# Altium PCB XCKU5P.PcbDoc (part 3 of 4)
Units mil, origin at the board's own origin, x right, y up, seen from the top; angles counter-clockwise.
Board outline 2716.54 x 2559.06 mil, 5 copper layers (Top Layer, SIG1, SIG2, SIG3, Bottom Layer); 206 components, 306 nets, 1544 pads, 186 vias.
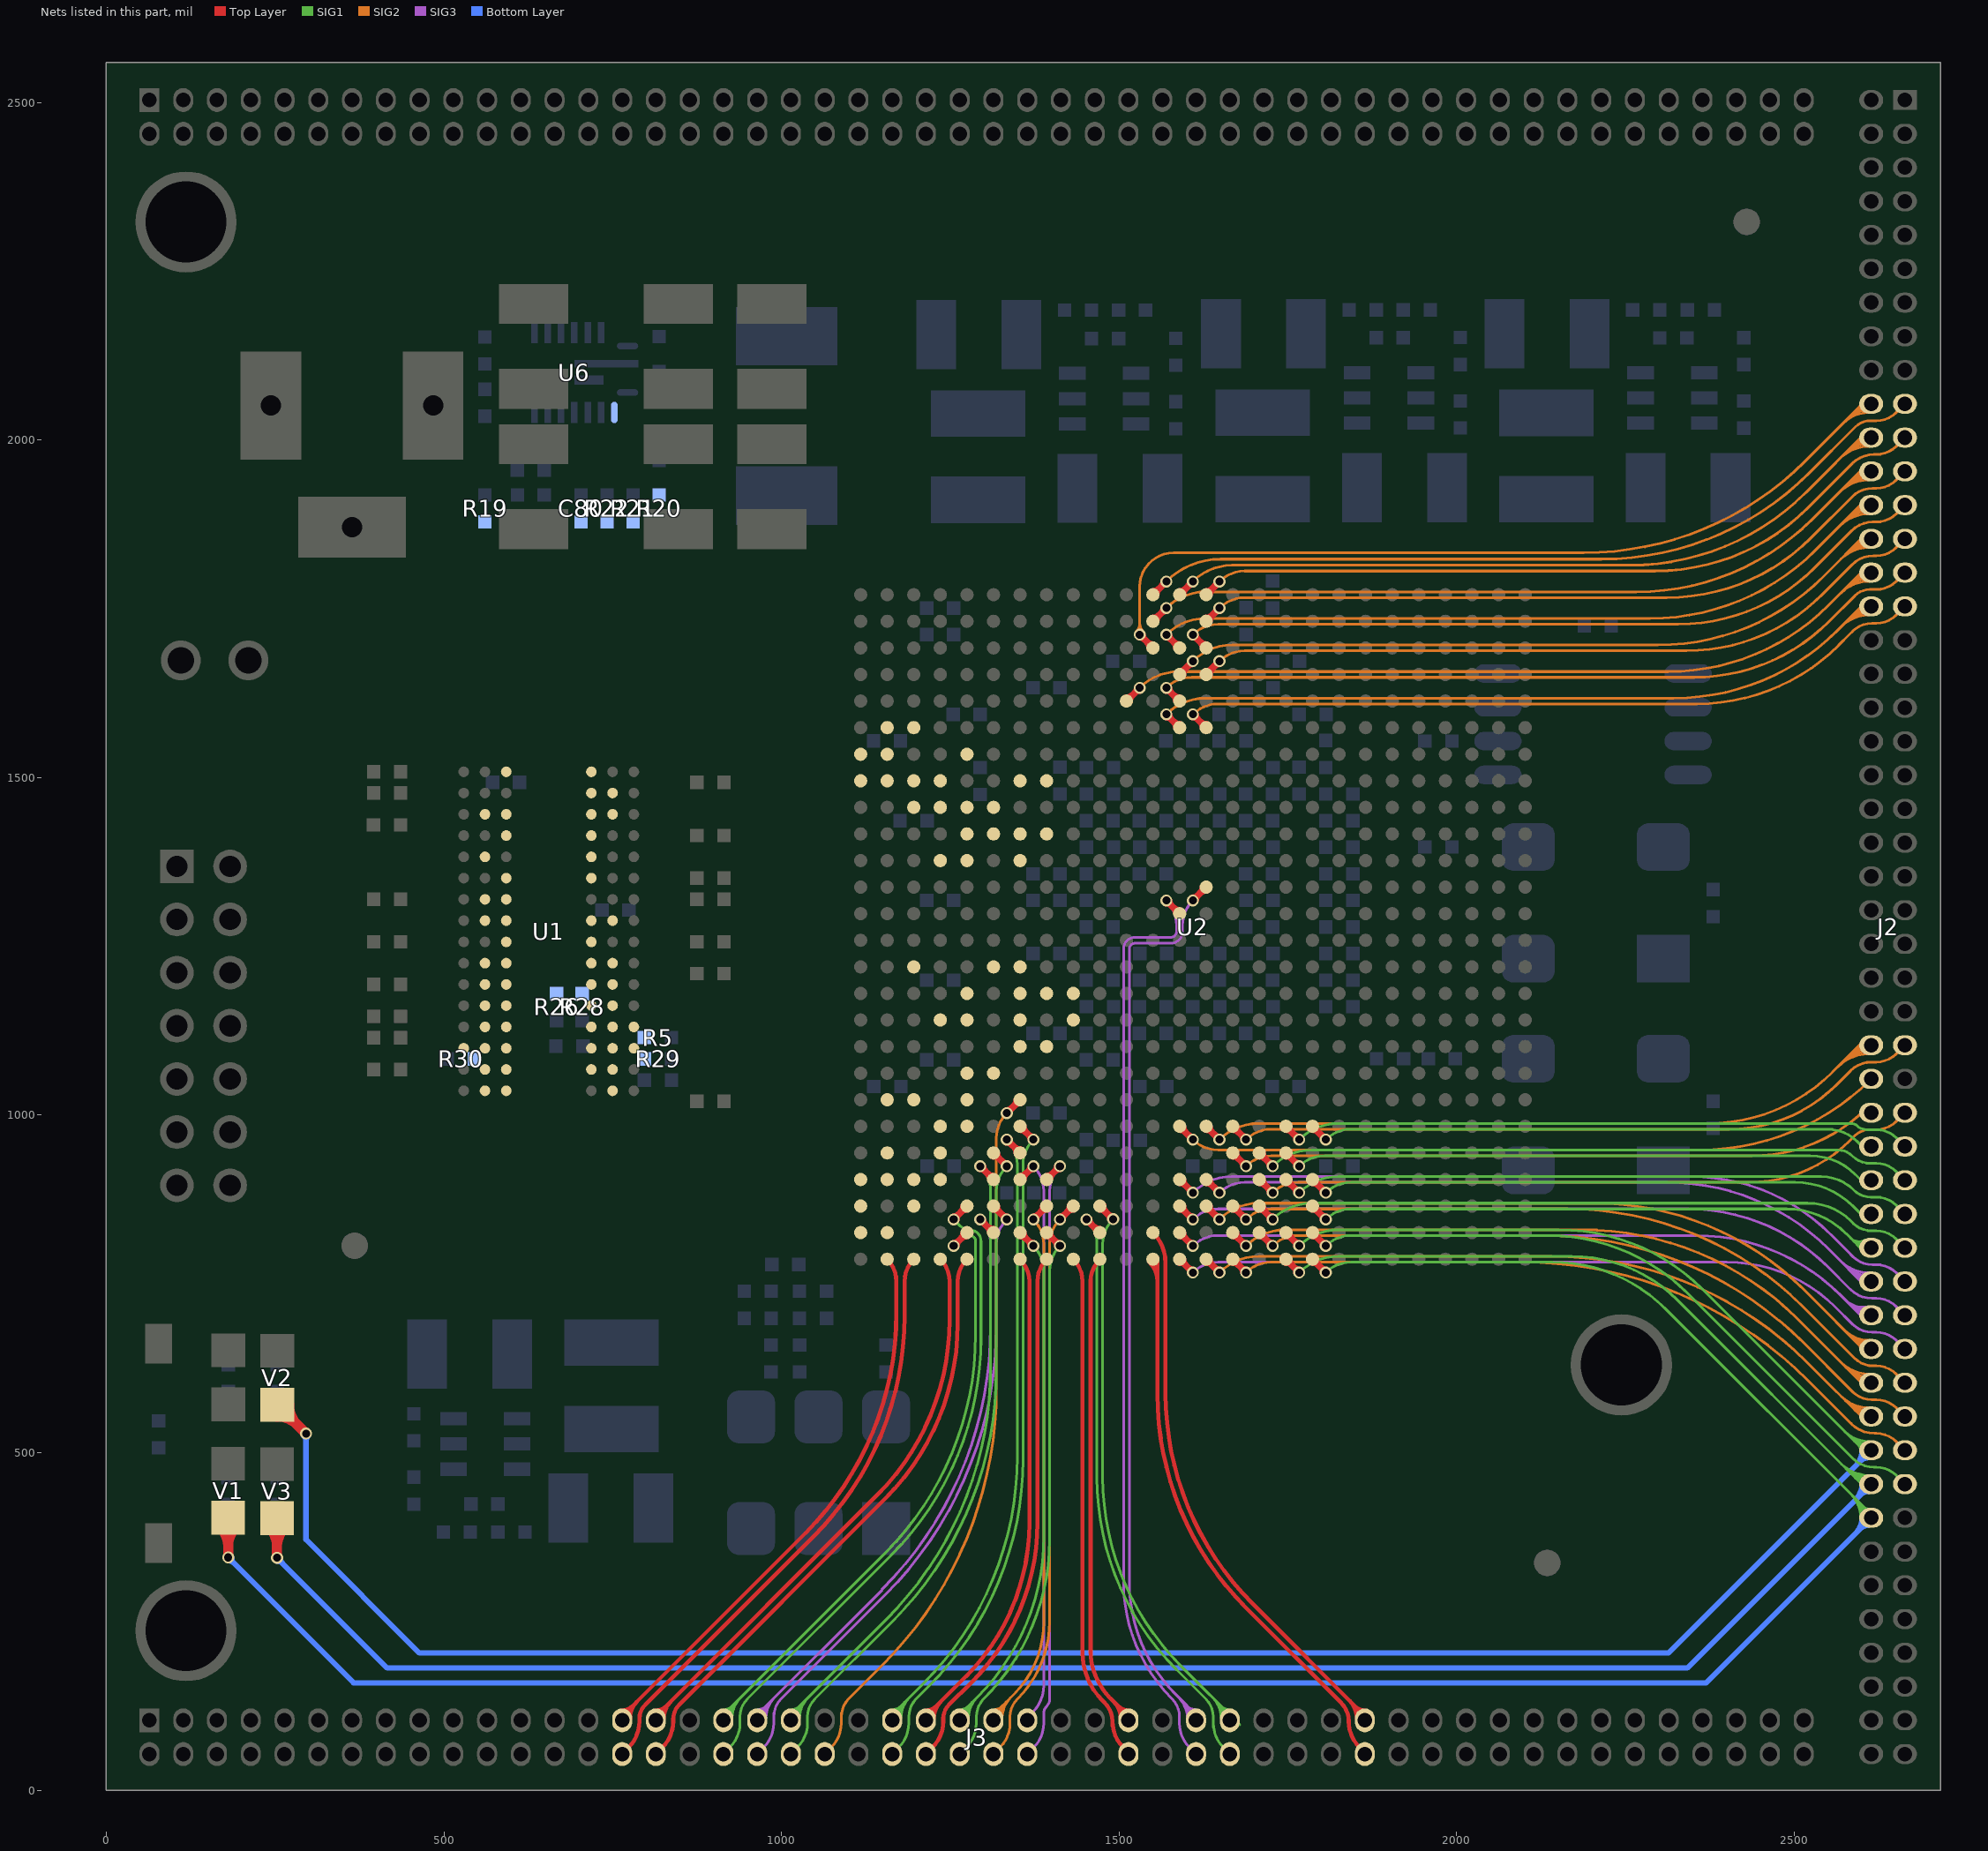
[diagram p6: the nets of this part, all layers, seen from the top]

## Via types
v1: diameter 17.72, hole 11.81, Top Layer to Bottom Layer, tented both sides, 186 vias

## Nets (pads, with @x,y where several pads share a name; then routed paths per layer and width w, separated by ;. In a path a pad name is that pad's centre, name@x,y a point inside that pad or via, vN(x,y) a via of type N, cw(c..) or ccw(c..) an arc to the next point about the centre after c; other vN are vias at no path point) (continued)
67_L9_P: J3.42 U2.G20 | length 1091
  Top Layer w10: v1(1333.76,1003.04) U2.G20@1353.45,1022.73 ; v1@1333.76,1006.9 ccw(c1333.76,1016.21) 1340.35,1009.63 ccw(c1346.94,1003.04) v1@1337.62,1003.04 ; U2.G20@1348.61,1022.73 cw(c1336.92,1022.73) 1345.18,1014.46 cw(c1353.45,1006.19) U2.G20@1353.45,1017.89
  SIG2 w4: J3.42@1064.02,53.5 1073.27,62.75 ccw(c1036.27,99.76) 1088.6,99.76 1088.6,108.71 cw(c1126.2,108.71) 1099.61,135.3 1148.59,184.27 ccw(c738.79,594.07) 1318.33,594.07 1318.33,965.78 cw(c1371.03,965.78) v1(1333.76,1003.04)
67_L10_N: J3.45 U2.E20 | length 1067.2
  Top Layer w10: v1@1333.76,959.82 cw(c1333.76,950.5) 1340.35,957.09 cw(c1346.94,963.67) v1@1337.62,963.67 ; v1(1333.76,963.67) U2.E20@1353.45,943.99 ; U2.E20@1348.61,943.99 ccw(c1336.92,943.99) 1345.18,952.25 ccw(c1353.45,960.52) U2.E20@1353.45,948.83
  SIG1 w4: J3.45@1164.02,111.72 1209.64,157.35 ccw(c872.73,494.26) 1349.2,494.26 1349.2,926.41 ccw(c1296.5,926.41) v1(1333.76,963.67) ; J3.45@1164.02,119.22 ccw(c1164.02,137.3) 1176.81,124.51 ; J3.45@1168.78,106.45 cw(c1193.01,106.45) 1175.88,123.58 ; J3.45@1172.78,106.45 cw(c1206.67,106.45) 1182.71,130.41 ; J3.45@1176.78,106.45 cw(c1220.32,106.45) 1189.54,137.24
67_L10_P: J3.46 U2.F20 | length 1031
  Top Layer w10: U2.F20@1353.45,978.52 cw(c1353.45,966.82) 1361.72,975.09 cw(c1369.98,983.36) U2.F20@1358.29,983.36 ; U2.F20@1353.45,983.36 v1(1373.13,963.67) ; v1@1369.28,963.67 ccw(c1359.96,963.67) 1366.55,970.26 ccw(c1373.13,976.84) v1@1373.13,967.53
  SIG1 w4: J3.46@1164.02,53.5 1173.27,62.75 ccw(c1136.27,99.76) 1188.6,99.76 1188.6,108.71 cw(c1226.2,108.71) 1199.61,135.3 1218.54,154.23 ccw(c882.6,490.17) 1357.7,490.17 1357.7,926.41 cw(c1410.4,926.41) v1(1373.13,963.67)
67_L12_N: J3.53 U2.D20 | length 884.7
  Top Layer w10: U2.D20@1353.45,904.62 v1(1373.13,924.3) ; U2.D20@1353.45,909.46 ccw(c1353.45,921.15) 1361.72,912.88 ccw(c1369.98,904.62) U2.D20@1358.29,904.62 ; v1@1369.28,924.3 cw(c1359.96,924.3) 1366.55,917.72 cw(c1373.13,911.13) v1@1373.13,920.45
  SIG3 w4: J3.53@1367.6,110.8 1371.93,115.13 ccw(c1331.77,155.3) 1388.57,155.3 1388.57,887.04 ccw(c1335.87,887.04) v1(1373.13,924.3)
67_L12_P: J3.54 U2.D19 | length 946
  Top Layer w10: U2.D19@1392.82,904.62 v1(1412.5,924.3) ; U2.D19@1392.82,909.46 ccw(c1392.82,921.15) 1401.09,912.88 ccw(c1409.35,904.62) U2.D19@1397.66,904.62 ; v1@1408.65,924.3 cw(c1399.33,924.3) 1405.92,917.72 cw(c1412.5,911.13) v1@1412.5,920.45
  SIG3 w4: J3.54@1364.02,53.5 1373.27,62.75 ccw(c1336.27,99.76) 1388.6,99.76 1388.6,114.08 cw(c1403.07,114.08) 1392.83,124.32 ccw(c1382.58,134.57) 1397.07,134.57 1397.07,141.5 1397.07,887.04 cw(c1449.77,887.04) v1(1412.5,924.3)
67_L13_N: J3.51 U2.C19 | length 918.6
  Top Layer w10: v1(1373.13,845.56) U2.C19@1392.82,865.25 ; v1@1373.13,849.42 ccw(c1373.13,858.73) 1379.72,852.15 ccw(c1386.31,845.56) v1@1376.99,845.56 ; U2.C19@1387.98,865.25 cw(c1376.29,865.25) 1384.55,856.98 cw(c1392.82,848.71) U2.C19@1392.82,860.41
  SIG2 w4: J3.51@1313.05,110.75 1344.24,141.94 ccw(c1237.22,248.96) 1388.57,248.96 1388.57,808.3 ccw(c1335.87,808.3) v1(1373.13,845.56) ; J3.51@1314.02,119.22 ccw(c1314.02,137.3) 1326.81,124.51 ; J3.51@1318.78,106.45 cw(c1343.01,106.45) 1325.88,123.58 ; J3.51@1322.78,106.45 cw(c1356.67,106.45) 1332.71,130.41 ; J3.51@1326.78,106.45 cw(c1370.32,106.45) 1339.54,137.24
67_L13_P: J3.52 U2.C18 | length 880.6
  Top Layer w10: v1(1412.5,845.56) U2.C18@1432.19,865.25 ; v1@1412.5,849.42 ccw(c1412.5,858.73) 1419.09,852.15 ccw(c1425.68,845.56) v1@1416.36,845.56 ; U2.C18@1427.35,865.25 cw(c1415.66,865.25) 1423.92,856.98 cw(c1432.19,848.71) U2.C18@1432.19,860.41
  SIG2 w4: J3.52@1314.02,53.5 1323.27,62.75 ccw(c1286.27,99.76) 1338.6,99.76 1338.6,108.71 cw(c1376.2,108.71) 1349.61,135.3 ccw(c1235.05,249.86) 1397.07,249.86 1397.07,808.3 cw(c1449.77,808.3) v1(1412.5,845.56)
67_L14_N: J3.49 U2.B20 | length 892.6
  Top Layer w10: U2.B20@1353.45,821.04 cw(c1353.45,809.34) 1361.72,817.61 cw(c1369.98,825.88) U2.B20@1358.29,825.88 ; U2.B20@1353.45,825.88 v1(1373.13,806.19) ; v1@1369.28,806.19 ccw(c1359.96,806.19) 1366.55,812.78 ccw(c1373.13,819.36) v1@1373.13,810.05
  SIG1 w4: J3.49@1262.55,110.25 1289.69,137.39 ccw(c1050.96,376.12) 1388.57,376.12 1388.57,768.93 ccw(c1335.87,768.93) v1(1373.13,806.19) ; J3.49@1264.02,119.22 ccw(c1264.02,137.3) 1276.81,124.51 ; J3.49@1268.78,106.45 cw(c1293.01,106.45) 1275.88,123.58 ; J3.49@1272.78,106.45 cw(c1306.67,106.45) 1282.71,130.41 ; J3.49@1276.78,106.45 cw(c1320.32,106.45) 1289.54,137.24
67_L14_P: J3.50 U2.B19 | length 854.6
  Top Layer w10: U2.B19@1392.82,821.04 cw(c1392.82,809.34) 1401.09,817.61 cw(c1409.35,825.88) U2.B19@1397.66,825.88 ; U2.B19@1392.82,825.88 v1(1412.5,806.19) ; v1@1408.65,806.19 ccw(c1399.33,806.19) 1405.92,812.78 ccw(c1412.5,819.36) v1@1412.5,810.05
  SIG1 w4: J3.50@1264.02,53.5 1273.27,62.75 ccw(c1236.27,99.76) 1288.6,99.76 1288.6,108.71 cw(c1326.2,108.71) 1299.61,135.3 ccw(c1064.33,370.58) 1397.07,370.58 1397.07,768.93 cw(c1449.77,768.93) v1(1412.5,806.19)
67_L15_N: J3.66 U2.B17 | length 917.2
  Top Layer w10: v1@1451.87,841.71 cw(c1451.87,832.39) 1458.46,838.98 cw(c1465.05,845.56) v1@1455.73,845.56 ; v1(1451.87,845.56) U2.B17@1471.56,825.88 ; U2.B17@1466.72,825.88 ccw(c1455.03,825.88) 1463.29,834.14 ccw(c1471.56,842.41) U2.B17@1471.56,830.72
  SIG1 w4: v1@1451.84,845.82 cw(c1414.57,808.55) 1467.27,808.55 1467.27,463.41 ccw(c1870.35,463.41) 1585.06,178.67 ; 1585.33,178.39 1628.43,135.3 cw(c1601.84,108.71) 1639.44,108.71 1639.44,99.76 ccw(c1691.77,99.76) 1654.77,62.75 J3.66@1664.02,53.5
67_L15_P: J3.65 U2.C17 | length 974.8
  Top Layer w10: U2.C17@1471.56,860.41 cw(c1471.56,848.71) 1479.83,856.98 cw(c1488.09,865.25) U2.C17@1476.4,865.25 ; U2.C17@1471.56,865.25 v1@1491.24,845.56 ; 1484.24,852.56 ccw(c1491.21,859.53) v1@1491.21,849.68 ; 1484.78,852.03 cw(c1478.57,845.82) v1@1487.35,845.82
  SIG1 w4: v1(1491.21,845.82) ccw(c1528.47,808.55) 1475.77,808.55 1475.77,463.95 ccw(c1871.65,463.95) 1591.72,184.02 1678.72,97.02 ; 1638.5,137.24 cw(c1607.72,106.45) J3.65@1651.26,106.45 ; 1645.33,130.41 cw(c1621.37,106.45) J3.65@1655.26,106.45 ; 1651.23,124.51 ccw(c1664.02,137.3) J3.65@1664.02,119.22 ; 1652.16,123.58 cw(c1635.03,106.45) J3.65@1659.26,106.45
67_L16_N: J3.60 U2.A18 | length 757.3
  Top Layer w6: U2.A18@1432.19,786.51 cw(c1399.15,753.47) 1445.87,753.47 1445.87,203.67 ccw(c1545.87,203.67) 1475.16,132.96 1479.13,129 cw(c1452.54,102.41) 1490.14,102.41 ccw(c1546.22,102.41) 1506.57,62.75 J3.60@1515.82,53.5
67_L16_P: J3.59 U2.A17 | length 760.7
  Top Layer w6: U2.A17@1471.56,786.51 ccw(c1504.6,753.47) 1457.87,753.47 1457.87,206.84 ccw(c1557.87,206.84) 1487.16,136.13 J3.59@1514.02,109.28 ; 1491.94,131.36 cw(c1467.04,106.45) J3.59@1502.26,106.45 ; 1498.76,124.54 ccw(c1514.02,139.8) J3.59@1514.02,118.22 ; 1502.18,121.11 cw(c1487.52,106.45) J3.59@1508.26,106.45
67_L17_N: J3.74 U2.A15 | length 889.1
  Top Layer w6: U2.A15@1545.46,781.67 cw(c1517.82,754.03) 1556.91,754.03 ; U2.A15@1549.7,785.91 cw(c1532.3,768.51) 1556.91,768.51 ; U2.A15@1556.91,787.9 1556.91,586.8 ccw(c2004.95,586.8) 1688.14,269.99 1829.13,129 cw(c1802.54,102.41) 1840.14,102.41 ccw(c1896.22,102.41) 1856.57,62.75 J3.74@1865.82,53.5
67_L17_P: J3.73 U2.B15 | length 881.3
  Top Layer w6: U2.B15@1550.3,825.88 cw(c1505.37,780.95) 1568.91,780.95 1568.91,587.43 ccw(c2009.14,587.43) 1697.85,276.15 J3.73@1860.43,113.56 ; 1841.45,132.55 cw(c1815.35,106.45) J3.73@1852.26,106.45 ; 1849.95,124.04 ccw(c1864.02,138.11) J3.73@1864.02,118.22 ; 1851.69,122.31 cw(c1835.83,106.45) J3.73@1858.26,106.45
67_L18_N: J3.47 U2.A20 | length 791.4
  Top Layer w6: J3.47@1214.02,109.28 1273,168.26 ccw(c1045.75,395.51) 1367.13,395.51 1367.13,753.47 ccw(c1320.41,753.47) U2.A20@1353.45,786.51 ; J3.47@1214.02,118.22 ccw(c1214.02,139.8) 1229.28,124.54 ; J3.47@1219.78,106.45 cw(c1240.52,106.45) 1225.86,121.11 ; J3.47@1225.78,106.45 cw(c1261,106.45) 1236.1,131.36
67_L18_P: J3.48 U2.A19 | length 787
  Top Layer w6: J3.48@1214.02,53.5 1223.27,62.75 ccw(c1183.61,102.41) 1239.7,102.41 1239.7,106.24 cw(c1268.07,106.24) 1248.01,126.29 1281.04,159.33 ccw(c1044.22,396.15) 1379.13,396.15 1379.13,753.47 cw(c1425.86,753.47) U2.A19@1392.82,786.51
67_L19_N: J3.31 U2.A23 | length 906.2
  Top Layer w6: J3.31@814.02,109.28 1141.47,436.73 ccw(c881.83,696.38) 1249.02,696.38 1249.02,753.47 ccw(c1202.3,753.47) U2.A23@1235.34,786.51 ; J3.31@814.02,118.22 ccw(c814.02,139.8) 829.28,124.54 ; J3.31@819.78,106.45 cw(c840.52,106.45) 825.86,121.11 ; J3.31@825.78,106.45 cw(c861,106.45) 836.1,131.36
67_L19_P: J3.32 U2.A22 | length 902.3
  Top Layer w6: J3.32@814.02,53.5 823.27,62.75 ccw(c783.61,102.41) 839.7,102.41 839.7,104.85 cw(c871.41,104.85) 848.99,127.27 1154.05,432.33 ccw(c895.78,690.6) 1261.02,690.6 1261.02,753.47 cw(c1307.75,753.47) U2.A22@1274.71,786.51
67_L20_N: J3.39 U2.D21 | length 1077.2
  Top Layer w10: v1@1294.39,920.45 cw(c1294.39,911.13) 1300.98,917.72 cw(c1307.57,924.3) v1@1298.25,924.3 ; v1(1294.39,924.3) U2.D21@1314.08,904.62 ; U2.D21@1309.24,904.62 ccw(c1297.55,904.62) 1305.81,912.88 ccw(c1314.08,921.15) U2.D21@1314.08,909.46
  SIG1 w4: J3.39@1009.91,107.61 1155.07,252.78 ccw(c781.47,626.39) 1309.83,626.39 1309.83,887.04 ccw(c1257.13,887.04) v1(1294.39,924.3) ; J3.39@1014.02,119.22 ccw(c1014.02,137.3) 1026.81,124.51 ; J3.39@1018.78,106.45 cw(c1043.01,106.45) 1025.88,123.58 ; J3.39@1022.78,106.45 cw(c1056.67,106.45) 1032.71,130.41 ; J3.39@1026.78,106.45 cw(c1070.32,106.45) 1039.54,137.24
67_L20_P: J3.40 U2.E21 | length 1035.4
  Top Layer w10: U2.E21@1314.08,939.15 cw(c1314.08,927.45) 1322.35,935.72 cw(c1330.61,943.99) U2.E21@1318.92,943.99 ; U2.E21@1314.08,943.99 v1(1333.76,924.3) ; v1@1329.91,924.3 ccw(c1320.59,924.3) 1327.18,930.89 ccw(c1333.76,937.47) v1@1333.76,928.16
  SIG1 w4: J3.40@1014.02,53.5 1023.27,62.75 ccw(c986.27,99.76) 1038.6,99.76 1038.6,108.71 cw(c1076.2,108.71) 1049.61,135.3 1164.66,250.35 ccw(c793.68,621.33) 1318.33,621.33 1318.33,887.04 cw(c1371.03,887.04) v1(1333.76,924.3)
67_L22_N: J3.37 U2.B21 | length 1017.3
  Top Layer w10: v1@1294.39,841.71 cw(c1294.39,832.39) 1300.98,838.98 cw(c1307.57,845.56) v1@1298.25,845.56 ; v1(1294.39,845.56) U2.B21@1314.08,825.88 ; U2.B21@1309.24,825.88 ccw(c1297.55,825.88) 1305.81,834.14 ccw(c1314.08,842.41) U2.B21@1314.08,830.72
  SIG3 w4: J3.37@960.01,107.51 1148.99,296.5 ; J3.37@964.02,119.22 ccw(c964.02,137.78) 977.15,124.65 ; J3.37@968.78,106.45 cw(c992.53,106.45) 975.74,123.25 ; J3.37@972.78,106.45 cw(c1006.19,106.45) 982.57,130.08 ; J3.37@976.78,106.45 cw(c1019.85,106.45) 989.4,136.9 ; 1148.58,296.91 ccw(c759.29,686.21) 1309.83,686.21 1309.83,808.3 ccw(c1257.13,808.3) v1(1294.39,845.56)
67_L22_P: J3.38 U2.C21 | length 975.7
  Top Layer w10: U2.C21@1314.08,860.41 cw(c1314.08,848.71) 1322.35,856.98 cw(c1330.61,865.25) U2.C21@1318.92,865.25 ; U2.C21@1314.08,865.25 v1(1333.76,845.56) ; v1@1329.91,845.56 ccw(c1320.59,845.56) 1327.18,852.15 ccw(c1333.76,858.73) v1@1333.76,849.42
  SIG3 w4: J3.38@964.02,53.5 973.27,62.75 ccw(c936.27,99.76) 988.6,99.76 988.6,108.71 cw(c1026.2,108.71) 999.61,135.3 1153.83,289.51 ccw(c756.69,686.65) 1318.33,686.65 1318.33,808.3 cw(c1371.03,808.3) v1(1333.76,845.56)
67_L23_N: J3.29 U2.A25 | length 890.2
  Top Layer w6: J3.29@764.02,109.28 1035.19,380.45 ccw(c709.04,706.59) 1170.28,706.59 1170.28,753.47 ccw(c1123.56,753.47) U2.A25@1156.6,786.51 ; J3.29@764.02,118.22 ccw(c764.02,139.8) 779.28,124.54 ; J3.29@769.78,106.45 cw(c790.52,106.45) 775.86,121.11 ; J3.29@775.78,106.45 cw(c811,106.45) 786.1,131.36
67_L23_P: J3.30 U2.A24 | length 886.4
  Top Layer w6: J3.30@764.02,53.5 773.27,62.75 ccw(c733.61,102.41) 789.7,102.41 789.7,106.24 cw(c818.06,106.24) 798.01,126.29 1046.99,375.28 ccw(c720.37,701.9) 1182.28,701.9 1182.28,753.47 cw(c1229.01,753.47) U2.A24@1195.97,786.51
67_L24_N: J3.35 U2.B22 | length 1039.9
  Top Layer w10: v1(1255.02,806.19) U2.B22@1274.71,825.88 ; v1@1255.02,810.05 ccw(c1255.02,819.36) 1261.61,812.78 ccw(c1268.2,806.19) v1@1258.88,806.19 ; U2.B22@1269.87,825.88 cw(c1258.18,825.88) 1266.44,817.61 cw(c1274.71,809.34) U2.B22@1274.71,821.04
  SIG1 w4: J3.35@909.91,107.61 1153.7,351.4 ccw(c830.71,674.39) 1287.48,674.39 1287.48,813.51 ccw(c1279.61,813.51) 1279.61,821.38 1278.35,821.38 ccw(c1278.35,801.7) 1264.44,815.61 v1(1255.02,806.19) ; J3.35@914.02,119.22 ccw(c914.02,137.3) 926.81,124.51 ; J3.35@918.78,106.45 cw(c943.01,106.45) 925.88,123.58 ; J3.35@922.78,106.45 cw(c956.67,106.45) 932.71,130.41 ; J3.35@926.78,106.45 cw(c970.32,106.45) 939.54,137.24
67_L24_P: J3.36 U2.C22 | length 1010.5
  Top Layer w10: v1(1255.02,845.56) U2.C22@1274.71,865.25 ; v1@1255.02,849.42 ccw(c1255.02,858.73) 1261.61,852.15 ccw(c1268.2,845.56) v1@1258.88,845.56 ; U2.C22@1269.87,865.25 cw(c1258.18,865.25) 1266.44,856.98 cw(c1274.71,848.71) U2.C22@1274.71,860.41
  SIG1 w4: J3.36@914.02,53.5 923.27,62.75 ccw(c886.27,99.76) 938.6,99.76 938.6,108.71 cw(c976.2,108.71) 949.61,135.3 1162.12,347.81 ; 1162.36,348.05 ccw(c840.16,669.77) 1295.48,669.77 1295.48,813.89 ccw(c1280,813.89) 1280,829.38 cw(c1280,850.59) 1265,835.59 v1(1255.02,845.56)
A9: J2.86 U2.A9 V1.2 | length 3933.6
  Top Layer w10: U2.A9@1786.52,781.67 cw(c1786.52,769.97) 1794.79,778.24 cw(c1803.05,786.51) U2.A9@1791.36,786.51 ; U2.A9@1786.52,786.51 v1(1806.21,766.82) ; v1@1802.35,766.82 ccw(c1793.03,766.82) 1799.62,773.41 ccw(c1806.21,779.99) v1@1806.21,770.68
  Top Layer w15: V1.2@168.15,391.14 cw(c138.28,361.27) 180.53,361.27 cw(c222.77,361.27) V1.2@192.9,391.14 ; v1(180.53,344.77) V1.2@180.53,403.52
  SIG1 w4: v1(1806.21,766.82) cw(c1843.47,729.56) 1843.47,782.26 2141.87,782.26 cw(c2141.87,545) 2309.63,712.77 J2.86@2614.02,408.38 ; 2583.74,438.66 cw(c2548.58,403.5) J2.86@2598.3,403.5 ; 2590.57,431.83 cw(c2562.24,403.5) J2.86@2602.3,403.5 ; 2597.4,425 cw(c2575.89,403.5) J2.86@2606.3,403.5 ; 2602.65,419.75 ccw(c2611.07,428.17) J2.86@2611.07,416.26 ; 2604.22,418.18 cw(c2589.55,403.5) J2.86@2610.3,403.5
  Bottom Layer w8: v1@180.53,339.92 cw(c180.53,328.19) 188.82,336.48 cw(c197.11,344.77) v1@185.38,344.77 ; v1(180.53,344.77) 366.3,159 2369.52,159 J2.86@2614.02,403.5 ; 2590.6,380.08 ccw(c2567.19,403.5) J2.86@2600.3,403.5 ; 2597.73,387.21 cw(c2611.07,373.88) J2.86@2611.07,392.74
A10: J2.84 U2.A10 V3.2 | length 3907.8
  Top Layer w10: U2.A10@1747.15,781.67 cw(c1747.15,769.97) 1755.42,778.24 cw(c1763.68,786.51) U2.A10@1751.99,786.51 ; U2.A10@1747.15,786.51 v1(1766.84,766.82) ; v1@1762.98,766.82 ccw(c1753.66,766.82) 1760.25,773.41 ccw(c1766.84,779.99) v1@1766.84,770.68
  Top Layer w15: V3.2@240.56,390.64 cw(c210.69,360.77) 252.94,360.77 cw(c295.18,360.77) V3.2@265.31,390.64 ; v1(252.94,344.27) V3.2@252.94,403.02
  SIG1 w4: v1(1766.84,766.82) cw(c1824.62,709.04) 1824.62,790.76 2170.44,790.76 cw(c2170.44,569.11) 2327.16,725.84 J2.84@2608.55,444.45 ; 2569.53,483.47 ccw(c2611.07,525) J2.84@2611.07,466.26 ; 2576.36,476.64 ccw(c2611.07,511.35) J2.84@2611.07,462.26 ; 2583.19,469.81 ccw(c2611.07,497.69) J2.84@2611.07,458.26 ; 2590.02,462.98 ccw(c2611.07,484.03) J2.84@2611.07,454.26
  Bottom Layer w8: v1@252.94,339.42 cw(c252.94,327.69) 261.23,335.98 cw(c269.52,344.27) v1@257.79,344.27 ; v1(252.94,344.27) 416.21,181 2341.52,181 J2.84@2614.02,453.5 ; 2590.6,430.08 ccw(c2567.19,453.5) J2.84@2600.3,453.5 ; 2597.73,437.21 cw(c2611.07,423.88) J2.84@2611.07,442.74
A12: J2.81 U2.A12 | length 1126.7
  Top Layer w10: U2.A12@1668.41,781.67 cw(c1668.41,769.97) 1676.68,778.24 cw(c1684.94,786.51) U2.A12@1673.25,786.51 ; U2.A12@1668.41,786.51 v1(1688.1,766.82) ; v1@1684.24,766.82 ccw(c1674.92,766.82) 1681.51,773.41 ccw(c1688.1,779.99) v1@1688.1,770.68
  SIG2 w4: v1(1688.1,766.82) cw(c1725.36,729.56) 1725.36,782.26 2097.39,782.26 cw(c2097.39,184.38) 2520.16,607.14 2582.5,544.8 2584.58,542.72 ccw(c2618.92,577.07) 2618.92,528.5 2621.4,528.5 cw(c2621.4,485.96) 2651.48,516.04 J2.81@2664.02,503.5
A13: J2.80 U2.A13 | length 1245.9
  Top Layer w10: U2.A13@1629.04,781.67 cw(c1629.04,769.97) 1637.31,778.24 cw(c1645.57,786.51) U2.A13@1633.88,786.51 ; U2.A13@1629.04,786.51 v1(1648.73,766.82) ; v1@1644.87,766.82 ccw(c1635.55,766.82) 1642.14,773.41 ccw(c1648.73,779.99) v1@1648.73,770.68
  SIG2 w4: v1(1648.73,766.82) cw(c1706.51,709.04) 1706.51,790.76 2141.01,790.76 cw(c2141.01,256.88) 2518.51,634.39 J2.80@2608.55,544.35 ; 2569.36,583.54 ccw(c2611.07,625.24) J2.80@2611.07,566.26 ; 2576.19,576.71 ccw(c2611.07,611.59) J2.80@2611.07,562.26 ; 2583.02,569.88 ccw(c2611.07,597.93) J2.80@2611.07,558.26 ; 2589.85,563.05 ccw(c2611.07,584.27) J2.80@2611.07,554.26
A14: J2.75 U2.A14 | length 1159.6
  Top Layer w10: U2.A14@1589.67,781.67 cw(c1589.67,769.97) 1597.94,778.24 cw(c1606.2,786.51) U2.A14@1594.51,786.51 ; U2.A14@1589.67,786.51 v1(1609.36,766.82) ; v1@1605.5,766.82 ccw(c1596.18,766.82) 1602.77,773.41 ccw(c1609.36,779.99) v1@1609.36,770.68
  SIG3 w4: v1(1609.36,766.82) cw(c1646.62,729.56) 1646.62,782.26 2399.98,782.26 cw(c2399.98,554.69) 2560.9,715.6 2586,690.5 ccw(c2614.97,719.47) 2614.97,678.5 2621.4,678.5 cw(c2621.4,635.96) 2651.48,666.04 J2.75@2664.02,653.5
AA13: J2.31 U2.AA13 | length 1163.1
  Top Layer w10: v1@1609.35,1589.74 cw(c1609.35,1580.42) 1615.94,1587.01 cw(c1622.53,1593.6) v1@1613.21,1593.6 ; v1(1609.35,1593.6) U2.AA13@1629.04,1573.91 ; U2.AA13@1624.2,1573.91 ccw(c1612.51,1573.91) 1620.77,1582.18 ccw(c1629.04,1590.44) U2.AA13@1629.04,1578.75
  SIG2 w4: v1(1609.35,1593.6) cw(c1646.62,1556.33) 1646.62,1609.03 2355.84,1609.03 ccw(c2355.84,1906.2) 2565.97,1696.07 2581.9,1712 2586.59,1716.69 cw(c2615.1,1688.17) 2615.1,1728.5 2621.4,1728.5 ccw(c2621.4,1771.04) 2651.48,1740.96 J2.31@2664.02,1753.5
AA14: J2.32 U2.AA14 | length 1288.6
  Top Layer w10: v1@1569.98,1589.74 cw(c1569.98,1580.42) 1576.57,1587.01 cw(c1583.16,1593.6) v1@1573.84,1593.6 ; v1(1569.98,1593.6) U2.AA14@1589.67,1573.91 ; U2.AA14@1584.83,1573.91 ccw(c1573.14,1573.91) 1581.4,1582.18 ccw(c1589.67,1590.44) U2.AA14@1589.67,1578.75
  SIG2 w4: v1(1569.98,1593.6) cw(c1627.77,1535.81) 1627.77,1617.53 2321.87,1617.53 ccw(c2321.87,1959.76) 2563.87,1717.77 J2.32@2608,1761.9 ; 2569.7,1723.6 cw(c2611.07,1682.24) J2.32@2611.07,1740.74 ; 2576.53,1730.43 cw(c2611.07,1695.89) J2.32@2611.07,1744.74 ; 2583.36,1737.26 cw(c2611.07,1709.55) J2.32@2611.07,1748.74 ; 2590.19,1744.09 cw(c2611.07,1723.21) J2.32@2611.07,1752.74
AB14: J2.29 U2.AB14 | length 1207.9
  Top Layer w10: v1@1569.98,1629.11 cw(c1569.98,1619.79) 1576.57,1626.38 cw(c1583.16,1632.97) v1@1573.84,1632.97 ; v1(1569.98,1632.97) U2.AB14@1589.67,1613.28 ; U2.AB14@1584.83,1613.28 ccw(c1573.14,1613.28) 1581.4,1621.55 ccw(c1589.67,1629.81) U2.AB14@1589.67,1618.12
  SIG2 w4: v1(1569.98,1632.97) cw(c1607.25,1595.7) 1607.25,1648.4 2351.98,1648.4 ccw(c2351.98,1930.45) 2551.41,1731.01 2589.85,1769.45 cw(c2611.69,1747.61) 2611.69,1778.5 2621.4,1778.5 ccw(c2621.4,1821.04) 2651.48,1790.96 J2.29@2664.02,1803.5
AB16: J2.30 U2.AB16 | length 1351.4
  Top Layer w10: U2.AB16@1510.93,1613.28 v1(1530.61,1632.97) ; U2.AB16@1510.93,1618.12 ccw(c1510.93,1629.81) 1519.2,1621.55 ccw(c1527.46,1613.28) U2.AB16@1515.77,1613.28 ; 1524.03,1626.38 ccw(c1517.44,1632.97) v1@1526.75,1632.97 ; 1524.03,1626.38 cw(c1530.61,1619.8) v1@1530.61,1629.11
  SIG2 w4: v1(1530.61,1632.97) cw(c1588.4,1575.18) 1588.4,1656.9 2313.33,1656.9 ccw(c2313.33,1993.13) 2551.08,1755.38 J2.30@2607.45,1811.75 ; 2569.02,1773.32 cw(c2611.07,1731.27) J2.30@2611.07,1790.74 ; 2575.85,1780.15 cw(c2611.07,1744.93) J2.30@2611.07,1794.74 ; 2582.68,1786.98 cw(c2611.07,1758.59) J2.30@2611.07,1798.74 ; 2589.5,1793.8 cw(c2611.07,1772.24) J2.30@2611.07,1802.74 ; 2596.33,1800.63 cw(c2611.07,1785.9) J2.30@2611.07,1806.74
AC13: J2.27 U2.AC13 | length 1133
  Top Layer w10: U2.AC13@1629.04,1652.65 v1(1648.73,1672.34) ; U2.AC13@1629.04,1657.49 ccw(c1629.04,1669.18) 1637.31,1660.92 ccw(c1645.57,1652.65) U2.AC13@1633.88,1652.65 ; v1@1644.87,1672.34 cw(c1635.55,1672.34) 1642.14,1665.75 cw(c1648.73,1659.16) v1@1648.73,1668.48
  SIG2 w4: v1(1648.73,1672.34) cw(c1685.99,1635.07) 1685.99,1687.77 2340.34,1687.77 ccw(c2340.34,1972.25) 2541.49,1771.09 2586.16,1815.76 cw(c2616.92,1785.01) 2616.92,1828.5 2621.4,1828.5 ccw(c2621.4,1871.04) 2651.48,1840.96 J2.27@2664.02,1853.5
AC14: J2.28 U2.AC14 | length 1278.9
  Top Layer w10: U2.AC14@1589.67,1652.65 v1(1609.36,1672.34) ; U2.AC14@1589.67,1657.49 ccw(c1589.67,1669.18) 1597.94,1660.92 ccw(c1606.2,1652.65) U2.AC14@1594.51,1652.65 ; v1@1605.5,1672.34 cw(c1596.18,1672.34) 1602.77,1665.75 cw(c1609.36,1659.16) v1@1609.36,1668.48
  SIG2 w4: v1(1609.36,1672.34) cw(c1667.14,1614.55) 1667.14,1696.27 ; 1667.14,1696.27 2298.44,1696.27 ; 2298.44,1696.27 ccw(c2298.44,2042.53) 2543.29,1797.69 J2.28@2608.35,1862.75 ; 2568.85,1823.25 cw(c2611.07,1781.03) J2.28@2611.07,1840.74 ; 2575.68,1830.08 cw(c2611.07,1794.69) J2.28@2611.07,1844.74 ; 2582.51,1836.91 cw(c2611.07,1808.34) J2.28@2611.07,1848.74 ; 2589.33,1843.73 cw(c2611.07,1822) J2.28@2611.07,1852.74 ; 2596.16,1850.56 cw(c2611.07,1835.66) J2.28@2611.07,1856.74
AD13: J2.25 U2.AD13 | length 1176.7
  Top Layer w10: v1@1609.35,1707.85 cw(c1609.35,1698.53) 1615.94,1705.12 cw(c1622.53,1711.71) v1@1613.21,1711.71 ; v1(1609.35,1711.71) U2.AD13@1629.04,1692.02 ; U2.AD13@1624.2,1692.02 ccw(c1612.51,1692.02) 1620.77,1700.29 ccw(c1629.04,1708.55) U2.AD13@1629.04,1696.86
  SIG2 w4: v1(1609.35,1711.71) cw(c1646.62,1674.44) 1646.62,1727.14 2328.43,1727.14 ccw(c2328.43,2013) 2530.57,1810.87 2585.56,1865.86 cw(c2616.07,1835.35) 2616.07,1878.5 2621.4,1878.5 ccw(c2621.4,1921.04) 2651.48,1890.96 J2.25@2664.02,1903.5
AD14: J2.26 U2.AD14 | length 1328.3
  Top Layer w10: v1@1569.98,1707.85 cw(c1569.98,1698.53) 1576.57,1705.12 cw(c1583.16,1711.71) v1@1573.84,1711.71 ; v1(1569.98,1711.71) U2.AD14@1589.67,1692.02 ; U2.AD14@1584.83,1692.02 ccw(c1573.14,1692.02) 1581.4,1700.29 ccw(c1589.67,1708.55) U2.AD14@1589.67,1696.86
  SIG2 w4: v1(1569.98,1711.71) cw(c1627.77,1653.92) 1627.77,1735.64 2286.6,1735.64 ccw(c2286.6,2082.66) 2531.75,1837.05 ; 2531.98,1837.28 J2.26@2606.3,1911.6 ; 2567.31,1872.61 cw(c2611.07,1828.86) J2.26@2611.07,1890.74 ; 2574.14,1879.44 cw(c2611.07,1842.51) J2.26@2611.07,1894.74 ; 2580.97,1886.27 cw(c2611.07,1856.17) J2.26@2611.07,1898.74 ; 2587.8,1893.1 cw(c2611.07,1869.83) J2.26@2611.07,1902.74 ; 2594.63,1899.93 cw(c2611.07,1883.49) J2.26@2611.07,1906.74
AD15: J2.20 U2.AD15 | length 1467
  Top Layer w10: v1@1530.61,1707.85 cw(c1530.61,1698.53) 1537.2,1705.12 cw(c1543.79,1711.71) v1@1534.47,1711.71 ; v1(1530.61,1711.71) U2.AD15@1550.3,1692.02 ; U2.AD15@1545.46,1692.02 ccw(c1533.77,1692.02) 1542.03,1700.29 ccw(c1550.3,1708.55) U2.AD15@1550.3,1696.86
  SIG2 w4: v1@1525.76,1716.56 ccw(c1514.06,1728.26) 1530.61,1728.26 ccw(c1547.17,1728.26) v1@1535.46,1716.56 ; v1(1530.61,1711.71) 1530.61,1782.65 cw(c1580.86,1782.65) 1580.86,1832.9 2188.53,1832.9 ccw(c2188.53,2296.35) 2516.24,1968.64 J2.20@2605.65,2058.05 ; 2572.26,2024.66 cw(c2611.07,1985.86) J2.20@2611.07,2040.74 ; 2579.09,2031.49 cw(c2611.07,1999.52) J2.20@2611.07,2044.74 ; 2585.92,2038.32 cw(c2611.07,2013.17) J2.20@2611.07,2048.74 ; 2592.75,2045.15 cw(c2611.07,2026.83) J2.20@2611.07,2052.74 ; 2596.33,2048.73 ccw(c2591.55,2053.5) J2.20@2598.3,2053.5
ADC_VN: J3.63 U2.R13 | length 1468.9
  Top Layer w10: v1(1609.35,1318) U2.R13@1629.04,1337.69 ; v1@1609.35,1321.86 ccw(c1609.35,1331.18) 1615.94,1324.59 ccw(c1622.53,1318) v1@1613.21,1318 ; U2.R13@1624.2,1337.69 cw(c1612.51,1337.69) 1620.77,1329.42 cw(c1629.04,1321.16) U2.R13@1629.04,1332.85
  SIG3 w4: 1588.64,136.9 cw(c1558.19,106.45) J3.63@1601.26,106.45 ; 1593.92,1271.58 1593.92,1280.74 cw(c1646.62,1280.74) v1(1609.35,1318) ; 1593.96,1271.58 cw(c1577.08,1271.58) 1577.08,1254.7 1524.18,1254.7 ccw(c1524.18,1245.65) 1515.13,1245.65 1515.13,308 ccw(c1750.71,308) 1584.13,141.41 J3.63@1618.03,107.51 ; 1595.47,130.08 cw(c1571.85,106.45) J3.63@1605.26,106.45 ; 1600.89,124.65 ccw(c1614.02,137.78) J3.63@1614.02,119.22 ; 1602.3,123.25 cw(c1585.5,106.45) J3.63@1609.26,106.45
ADC_VP: J3.64 U2.P14 | length 1427.2
  Top Layer w10: v1@1569.99,1314.14 cw(c1569.99,1304.83) 1576.57,1311.42 cw(c1583.16,1318) v1@1573.84,1318 ; v1(1569.99,1318) U2.P14@1589.67,1298.32 ; U2.P14@1584.83,1298.32 ccw(c1573.14,1298.32) 1581.4,1306.59 ccw(c1589.67,1314.85) U2.P14@1589.67,1303.16
  SIG3 w4: v1(1569.99,1318) cw(c1532.72,1280.74) 1585.42,1280.74 1585.42,1272.25 ; 1585.47,1272.25 cw(c1576.41,1272.25) 1576.41,1263.2 1523.51,1263.2 ccw(c1523.51,1246.32) 1506.63,1246.32 1506.63,308.62 ccw(c1751.75,308.62) 1578.43,135.3 cw(c1551.84,108.71) 1589.44,108.71 1589.44,99.76 ccw(c1641.77,99.76) 1604.77,62.75 J3.64@1614.02,53.5
AE13: J2.23 U2.AE13 | length 1141.1
  Top Layer w10: U2.AE13@1629.04,1731.39 v1(1648.73,1751.08) ; U2.AE13@1629.04,1736.23 ccw(c1629.04,1747.92) 1637.31,1739.66 ccw(c1645.57,1731.39) U2.AE13@1633.88,1731.39 ; v1@1644.87,1751.08 cw(c1635.55,1751.08) 1642.14,1744.49 cw(c1648.73,1737.9) v1@1648.73,1747.22
  SIG2 w4: v1(1648.73,1751.08) cw(c1685.99,1713.81) 1685.99,1766.51 2311.53,1766.51 ccw(c2311.53,2067.99) 2524.71,1854.81 2586.31,1916.41 cw(c2615.49,1887.24) 2615.49,1928.5 2621.4,1928.5 ccw(c2621.4,1971.04) 2651.48,1940.96 J2.23@2664.02,1953.5
AE15: J2.24 U2.AE15 | length 1335.9
  Top Layer w10: U2.AE15@1550.3,1731.39 v1(1569.99,1751.08) ; U2.AE15@1550.3,1736.23 ccw(c1550.3,1747.92) 1558.57,1739.66 ccw(c1566.83,1731.39) U2.AE15@1555.14,1731.39 ; v1@1566.13,1751.08 cw(c1556.81,1751.08) 1563.4,1744.49 cw(c1569.99,1737.9) v1@1569.99,1747.22
  SIG2 w4: v1(1569.99,1751.08) cw(c1627.77,1693.29) 1627.77,1775.01 2266.4,1775.01 ccw(c2266.4,2143.92) 2527.26,1883.06 J2.24@2605.45,1961.25 ; 2566.46,1922.26 cw(c2611.07,1877.65) J2.24@2611.07,1940.74 ; 2573.29,1929.09 cw(c2611.07,1891.31) J2.24@2611.07,1944.74 ; 2580.12,1935.92 cw(c2611.07,1904.96) J2.24@2611.07,1948.74 ; 2586.94,1942.74 cw(c2611.07,1918.62) J2.24@2611.07,1952.74 ; 2593.77,1949.57 cw(c2611.07,1932.28) J2.24@2611.07,1956.74
AF13: J2.21 U2.AF13 | length 1144.6
  Top Layer w10: U2.AF13@1629.04,1770.76 v1(1648.73,1790.45) ; U2.AF13@1629.04,1775.6 ccw(c1629.04,1787.29) 1637.31,1779.03 ccw(c1645.57,1770.76) U2.AF13@1633.88,1770.76 ; v1@1644.87,1790.45 cw(c1635.55,1790.45) 1642.14,1783.86 cw(c1648.73,1777.27) v1@1648.73,1786.59
  SIG2 w4: v1(1648.73,1790.45) cw(c1685.99,1753.18) 1685.99,1805.88 2294.22,1805.88 ccw(c2294.22,2125.42) 2520.17,1899.47 2585.91,1965.21 cw(c2617.99,1933.13) 2617.99,1978.5 2621.4,1978.5 ccw(c2621.4,2021.04) 2651.48,1990.96 J2.21@2664.02,2003.5
AF14: J2.22 U2.AF14 | length 1294.6
  Top Layer w10: U2.AF14@1589.67,1770.76 v1(1609.36,1790.45) ; U2.AF14@1589.67,1775.6 ccw(c1589.67,1787.29) 1597.94,1779.03 ccw(c1606.2,1770.76) U2.AF14@1594.51,1770.76 ; v1@1605.5,1790.45 cw(c1596.18,1790.45) 1602.77,1783.86 cw(c1609.36,1777.27) v1@1609.36,1786.59
  SIG2 w4: v1(1609.36,1790.45) cw(c1667.14,1732.66) 1667.14,1814.38 2256.85,1814.38 ccw(c2256.85,2182.62) 2517.24,1922.24 J2.22@2606.6,2011.6 ; 2567.82,1972.82 cw(c2611.07,1929.58) J2.22@2611.07,1990.74 ; 2574.65,1979.65 cw(c2611.07,1943.24) J2.22@2611.07,1994.74 ; 2581.48,1986.48 cw(c2611.07,1956.9) J2.22@2611.07,1998.74 ; 2588.31,1993.31 cw(c2611.07,1970.55) J2.22@2611.07,2002.74 ; 2595.14,2000.14 cw(c2611.07,1984.21) J2.22@2611.07,2006.74
AF15: J2.19 U2.AF15 | length 1236.6
  Top Layer w10: U2.AF15@1550.3,1770.76 v1(1569.99,1790.45) ; U2.AF15@1550.3,1775.6 ccw(c1550.3,1787.29) 1558.57,1779.03 ccw(c1566.83,1770.76) U2.AF15@1555.14,1770.76 ; v1@1566.13,1790.45 cw(c1556.81,1790.45) 1563.4,1783.86 cw(c1569.99,1777.27) v1@1569.99,1786.59
  SIG2 w4: v1(1569.99,1790.45) cw(c1649.74,1710.69) 1649.74,1823.48 2214.33,1823.48 ccw(c2214.33,2258.87) 2521.87,1950.67 ; 2522.2,1951 2590.4,2019.2 cw(c2612.85,1996.76) 2612.85,2028.5 2621.4,2028.5 ccw(c2621.4,2071.04) 2651.48,2040.96 J2.19@2664.02,2053.5
AGND: C80.1 R19.1 R20.2 R21.2 R22.2 U6.1
B9: J2.83 U2.B9 | length 1058.9
  Top Layer w10: U2.B9@1786.52,821.04 cw(c1786.52,809.34) 1794.79,817.61 cw(c1803.05,825.88) U2.B9@1791.36,825.88 ; U2.B9@1786.52,825.88 v1(1806.21,806.19) ; v1@1802.35,806.19 ccw(c1793.03,806.19) 1799.62,812.78 ccw(c1806.21,819.36) v1@1806.21,810.05
  SIG1 w4: v1(1806.21,806.19) cw(c1843.47,768.93) 1843.47,821.63 2135.39,821.63 cw(c2135.39,529.3) 2342.09,736.01 2586.6,491.5 ccw(c2617.98,522.88) 2617.98,478.5 2621.4,478.5 cw(c2621.4,435.96) 2651.48,466.04 J2.83@2664.02,453.5
B10: J2.82 U2.B10 V2.2 | length 4013.1
  Top Layer w10: U2.B10@1747.15,821.04 cw(c1747.15,809.34) 1755.42,817.61 cw(c1763.68,825.88) U2.B10@1751.99,825.88 ; U2.B10@1747.15,825.88 v1(1766.84,806.19) ; v1@1762.98,806.19 ccw(c1753.66,806.19) 1760.25,812.78 ccw(c1766.84,819.36) v1@1766.84,810.05
  Top Layer w15: V2.2@253.15,553.52 cw(c253.15,511.27) 283.02,541.14 cw(c312.89,571.02) V2.2@270.65,571.02 ; V2.2@253.15,571.02 v1(295.83,528.33)
  SIG1 w4: v1(1766.84,806.19) cw(c1824.62,748.41) 1824.62,830.13 2151.56,830.13 cw(c2151.56,529.52) 2364.12,742.08 J2.82@2609.35,496.85 ; 2574.99,531.21 ccw(c2611.07,567.28) J2.82@2611.07,516.26 ; 2581.82,524.38 ccw(c2611.07,553.62) J2.82@2611.07,512.26 ; 2588.65,517.55 ccw(c2611.07,539.96) J2.82@2611.07,508.26 ; 2595.19,511.01 cw(c2587.69,503.5) J2.82@2598.3,503.5 ; 2595.48,510.72 ccw(c2611.07,526.31) J2.82@2611.07,504.26
  Bottom Layer w8: v1@292.4,524.9 cw(c284.1,516.6) 295.83,516.6 cw(c307.56,516.6) v1@299.27,524.9 ; v1(295.83,528.33) 295.83,371.37 464,203.2 2313.72,203.2 J2.82@2614.02,503.5 ; 2590.6,480.08 ccw(c2567.19,503.5) J2.82@2600.3,503.5 ; 2597.73,487.21 cw(c2611.07,473.88) J2.82@2611.07,492.74
B11: J2.79 U2.B11 | length 1085.6
  Top Layer w10: U2.B11@1707.78,821.04 cw(c1707.78,809.34) 1716.05,817.61 cw(c1724.31,825.88) U2.B11@1712.62,825.88 ; U2.B11@1707.78,825.88 v1(1727.47,806.19) ; v1@1723.61,806.19 ccw(c1714.29,806.19) 1720.88,812.78 ccw(c1727.47,819.36) v1@1727.47,810.05
  SIG2 w4: v1(1727.47,806.19) cw(c1764.73,768.93) 1764.73,821.63 2129.39,821.63 cw(c2129.39,276.78) 2514.65,662.05 2580.95,595.75 2586.72,589.98 ccw(c2614.44,617.71) 2614.44,578.5 2621.4,578.5 cw(c2621.4,535.96) 2651.48,566.04 J2.79@2664.02,553.5
B12: J2.78 U2.B12 | length 1204.7
  Top Layer w10: U2.B12@1668.41,821.04 cw(c1668.41,809.34) 1676.68,817.61 cw(c1684.94,825.88) U2.B12@1673.25,825.88 ; U2.B12@1668.41,825.88 v1(1688.1,806.19) ; v1@1684.24,806.19 ccw(c1674.92,806.19) 1681.51,812.78 ccw(c1688.1,819.36) v1@1688.1,810.05
  SIG2 w4: v1(1688.1,806.19) cw(c1745.88,748.41) 1745.88,830.13 2185.47,830.13 cw(c2185.47,377.68) 2505.39,697.61 J2.78@2608.4,594.6 ; 2569.53,633.47 ccw(c2611.07,675) J2.78@2611.07,616.26 ; 2576.36,626.64 ccw(c2611.07,661.35) J2.78@2611.07,612.26 ; 2583.19,619.81 ccw(c2611.07,647.69) J2.78@2611.07,608.26 ; 2590.02,612.98 ccw(c2611.07,634.03) J2.78@2611.07,604.26
B14: J2.74 U2.B14 | length 1218.7
  Top Layer w10: U2.B14@1589.67,821.04 cw(c1589.67,809.34) 1597.94,817.61 cw(c1606.2,825.88) U2.B14@1594.51,825.88 ; U2.B14@1589.67,825.88 v1(1609.36,806.19) ; v1@1605.5,806.19 ccw(c1596.18,806.19) 1602.77,812.78 ccw(c1609.36,819.36) v1@1609.36,810.05
  SIG3 w4: v1(1609.36,806.19) cw(c1646.62,768.93) 1646.62,821.63 2354.66,821.63 cw(c2354.66,518.37) 2569.09,732.81 J2.74@2608.35,693.55 ; 2575.43,726.47 ccw(c2602.04,753.08) J2.74@2608.78,716.06 ; 2580.83,721.07 ccw(c2603.7,743.95) J2.74@2609.5,712.12 ; 2586.22,715.68 ccw(c2605.36,734.82) J2.74@2610.21,708.19 ; 2591.62,710.28 ccw(c2607.03,725.69) J2.74@2610.93,704.25
C9: J2.70 U2.C9 | length 970.2
  Top Layer w10: U2.C9@1786.52,860.41 cw(c1786.52,848.71) 1794.79,856.98 cw(c1803.05,865.25) U2.C9@1791.36,865.25 ; U2.C9@1786.52,865.25 v1(1806.21,845.56) ; v1@1802.35,845.56 ccw(c1793.03,845.56) 1799.62,852.15 ccw(c1806.21,858.73) v1@1806.21,849.42
  SIG1 w4: v1(1806.21,845.56) cw(c1843.47,808.3) 1843.47,861 2488.83,861 cw(c2488.83,736.74) 2576.7,824.6 J2.70@2607.45,793.85 ; 2583.33,817.97 ccw(c2596.35,830.99) J2.70@2605.04,814.75 ; 2587.14,814.16 ccw(c2599.01,826.03) J2.70@2606.93,811.23 ; 2590.95,810.35 ccw(c2601.67,821.06) J2.70@2608.82,807.7 ; 2594.77,806.53 ccw(c2604.33,816.09) J2.70@2610.71,804.17
C11: J2.69 U2.C11 | length 1023.7
  Top Layer w10: U2.C11@1707.78,860.41 cw(c1707.78,848.71) 1716.05,856.98 cw(c1724.31,865.25) U2.C11@1712.62,865.25 ; U2.C11@1707.78,865.25 v1(1727.47,845.56) ; v1@1723.61,845.56 ccw(c1714.29,845.56) 1720.88,852.15 ccw(c1727.47,858.73) v1@1727.47,849.42
  SIG1 w4: v1(1727.47,845.56) cw(c1785.25,787.78) 1785.25,869.5 2519.98,869.5 cw(c2519.98,778.9) 2584.04,842.96 2587.29,839.71 ccw(c2614.35,866.78) 2614.35,828.5 2621.4,828.5 cw(c2621.4,785.96) 2651.48,816.04 J2.69@2664.02,803.5
C12: J2.77 U2.C12 | length 1122.8
  Top Layer w10: U2.C12@1668.41,860.41 cw(c1668.41,848.71) 1676.68,856.98 cw(c1684.94,865.25) U2.C12@1673.25,865.25 ; U2.C12@1668.41,865.25 v1(1688.1,845.56) ; v1@1684.24,845.56 ccw(c1674.92,845.56) 1681.51,852.15 ccw(c1688.1,858.73) v1@1688.1,849.42
  SIG2 w4: v1(1688.1,845.56) cw(c1725.36,808.3) 1725.36,861 2163.91,861 cw(c2163.91,368.05) 2512.48,716.62 2589.1,640 ccw(c2616.86,667.76) 2616.86,628.5 2621.4,628.5 cw(c2621.4,585.96) 2651.48,616.04 J2.77@2664.02,603.5
C13: J2.76 U2.C13 | length 1225.3
  Top Layer w10: U2.C13@1629.04,860.41 cw(c1629.04,848.71) 1637.31,856.98 cw(c1645.57,865.25) U2.C13@1633.88,865.25 ; U2.C13@1629.04,865.25 v1(1648.73,845.56) ; v1@1644.87,845.56 ccw(c1635.55,845.56) 1642.14,852.15 ccw(c1648.73,858.73) v1@1648.73,849.42
  SIG2 w4: v1(1648.73,845.56) cw(c1706.51,787.78) 1706.51,869.5 2204.76,869.5 cw(c2204.76,431.21) 2514.67,741.13 J2.76@2608.35,647.45 ; 2574.31,681.49 ccw(c2611.07,718.24) J2.76@2611.07,666.26 ; 2581.14,674.66 ccw(c2611.07,704.59) J2.76@2611.07,662.26 ; 2587.97,667.83 ccw(c2611.07,690.93) J2.76@2611.07,658.26 ; 2594.8,661 ccw(c2611.07,677.27) J2.76@2611.07,654.26 ; 2595.48,660.32 cw(c2588.65,653.5) J2.76@2598.3,653.5
C14: J2.73 U2.C14 | length 1168.4
  Top Layer w10: U2.C14@1589.67,860.41 cw(c1589.67,848.71) 1597.94,856.98 cw(c1606.2,865.25) U2.C14@1594.51,865.25 ; U2.C14@1589.67,865.25 v1(1609.36,845.56) ; v1@1605.5,845.56 ccw(c1596.18,845.56) 1602.77,852.15 ccw(c1609.36,858.73) v1@1609.36,849.42
  SIG3 w4: v1(1609.36,845.56) cw(c1646.62,808.3) 1646.62,861 2342.35,861 cw(c2342.35,567.29) 2550.03,774.97 2583.22,741.78 ccw(c2615.28,773.84) 2615.28,728.5 2621.4,728.5 cw(c2621.4,685.96) 2651.48,716.04 J2.73@2664.02,703.5
D9: J2.68 U2.D9 | length 884.4
  Top Layer w10: U2.D9@1786.52,899.78 cw(c1786.52,888.08) 1794.79,896.35 cw(c1803.05,904.62) U2.D9@1791.36,904.62 ; U2.D9@1786.52,904.62 v1(1806.21,884.93) ; v1@1802.35,884.93 ccw(c1793.03,884.93) 1799.62,891.52 ccw(c1806.21,898.1) v1@1806.21,888.79
  SIG1 w4: v1(1806.21,884.93) cw(c1843.47,847.67) 1843.47,900.37 2501.37,900.37 cw(c2501.37,778.79) 2587.34,864.76 J2.68@2607.7,844.4
D10: J2.67 U2.D10 | length 981.1
  Top Layer w10: U2.D10@1747.15,899.78 cw(c1747.15,888.08) 1755.42,896.35 cw(c1763.68,904.62) U2.D10@1751.99,904.62 ; U2.D10@1747.15,904.62 v1(1766.84,884.93) ; v1@1762.98,884.93 ccw(c1753.66,884.93) 1760.25,891.52 ccw(c1766.84,898.1) v1@1766.84,888.79
  SIG1 w4: v1(1766.84,884.93) cw(c1824.62,827.15) 1824.62,908.87 2526.4,908.87 2539.92,908.87 cw(c2539.92,840.26) 2588.43,888.77 ccw(c2613.23,913.57) 2613.23,878.5 2621.4,878.5 cw(c2621.4,835.96) 2651.48,866.04 J2.67@2664.02,853.5
D11: J2.61 U2.D11 | length 1031.9
  Top Layer w10: U2.D11@1707.78,899.78 cw(c1707.78,888.08) 1716.05,896.35 cw(c1724.31,904.62) U2.D11@1712.62,904.62 ; U2.D11@1707.78,904.62 v1(1727.47,884.93) ; v1@1723.61,884.93 ccw(c1714.29,884.93) 1720.88,891.52 ccw(c1727.47,898.1) v1@1727.47,888.79
  SIG2 w4: v1(1727.47,884.93) cw(c1764.73,847.67) 1764.73,900.37 2432.76,900.37 ccw(c2432.76,1112.58) 2582.82,962.52 2589.64,969.34 cw(c2611.75,947.24) 2611.75,978.5 2621.4,978.5 ccw(c2621.4,1021.04) 2651.48,990.96 J2.61@2664.02,1003.5
D13: J2.72 U2.D13 | length 1234.2
  Top Layer w10: U2.D13@1629.04,899.78 cw(c1629.04,888.08) 1637.31,896.35 cw(c1645.57,904.62) U2.D13@1633.88,904.62 ; U2.D13@1629.04,904.62 v1(1648.73,884.93) ; v1@1644.87,884.93 ccw(c1635.55,884.93) 1642.14,891.52 ccw(c1648.73,898.1) v1@1648.73,888.79
  SIG3 w4: v1(1648.73,884.93) cw(c1685.99,847.67) 1685.99,900.37 2312.07,900.37 cw(c2312.07,562.22) 2551.17,801.33 J2.72@2608.3,744.2 ; 2568.68,783.82 ccw(c2611.07,826.21) J2.72@2611.07,766.26 ; 2575.51,776.99 ccw(c2611.07,812.55) J2.72@2611.07,762.26 ; 2582.34,770.16 ccw(c2611.07,798.9) J2.72@2611.07,758.26 ; 2589.16,763.34 ccw(c2611.07,785.24) J2.72@2611.07,754.26 ; 2595.99,756.51 ccw(c2611.07,771.58) J2.72@2611.07,750.26
D14: J2.71 U2.D14 | length 1170.1
  Top Layer w10: U2.D14@1589.67,899.78 cw(c1589.67,888.08) 1597.94,896.35 cw(c1606.2,904.62) U2.D14@1594.51,904.62 ; U2.D14@1589.67,904.62 v1(1609.36,884.93) ; v1@1605.5,884.93 ccw(c1596.18,884.93) 1602.77,891.52 ccw(c1609.36,898.1) v1@1609.36,888.79
  SIG3 w4: v1(1609.36,884.93) cw(c1667.14,827.15) 1667.14,908.87 2347.39,908.87 cw(c2347.39,616.88) 2553.85,823.35 2579.8,797.4 2586.61,790.59 ccw(c2615.79,819.76) 2615.79,778.5 2621.4,778.5 cw(c2621.4,735.96) 2651.48,766.04 J2.71@2664.02,753.5
DDR4_A0: U1.P3 U2.F22
DDR4_A1: U1.P7 U2.K20
DDR4_A2: U1.R3 U2.C26
DDR4_A3: U1.N7 U2.K18
DDR4_A4: U1.N3 U2.K22
DDR4_A5: U1.P8 U2.L19
DDR4_A6: U1.P2 U2.D23
DDR4_A7: U1.R8 U2.J20
DDR4_A8: U1.R2 U2.C24
DDR4_A9: U1.R7 U2.J19
DDR4_A10: U1.M3 U2.L22
DDR4_A11: U1.T2 U2.B26
DDR4_A12: U1.M7 U2.M20
DDR4_A13: U1.T8 U2.D24
DDR4_ACT: U1.L3 U2.M21
DDR4_ALERT: R29.1 U1.P9 U2.D25
DDR4_BA0: U1.N2 U2.E23
DDR4_BA1: U1.N8 U2.H22
DDR4_BG0: U1.M2 U2.E25
DDR4_CAS: U1.M8 U2.L18
DDR4_CKE: U1.K2 U2.K23
DDR4_CLK_N: R28.2 U1.K8 U2.G25
DDR4_CLK_P: R26.2 U1.K7 U2.G24
DDR4_CS: U1.L7 U2.G22
DDR4_D0: U1.G2 U2.U22
DDR4_D1: U1.F7 U2.W20
DDR4_D2: U1.H3 U2.U20
DDR4_D3: U1.H7 U2.W19
DDR4_D4: U1.H2 U2.U21
DDR4_D5: U1.H8 U2.T22
DDR4_D6: U1.J3 U2.T23
DDR4_D7: U1.J7 U2.T20
DDR4_D8: U1.A3 U2.AA24
DDR4_D9: U1.B8 U2.Y25
DDR4_D10: U1.C3 U2.V24
DDR4_D11: U1.C7 U2.Y26
DDR4_D12: U1.C2 U2.AA25
DDR4_D13: U1.C8 U2.W24
DDR4_D14: U1.D3 U2.W23
DDR4_D15: U1.D7 U2.V23
DDR4_DML: U1.E7 U2.U19
DDR4_DMU: U1.E2 U2.Y22
DDR4_DS0_N: U1.F3 U2.V22
DDR4_DS0_P: U1.G3 U2.V21
DDR4_DS1_N: U1.A7 U2.W26
DDR4_DS1_P: U1.B7 U2.W25
DDR4_ODT: U1.K3 U2.M24
DDR4_PAR: U1.T3 U2.B25
DDR4_RAS: U1.L8 U2.L20
DDR4_RESET: R30.1 U1.P1 U2.D26
DDR4_TEN: R5.1 U1.N9 U2.H21
DDR4_WE: U1.L2 U2.F23
E10: J2.66 U2.E10 | length 918.3
  Top Layer w10: U2.E10@1747.15,939.15 cw(c1747.15,927.45) 1755.42,935.72 cw(c1763.68,943.99) U2.E10@1751.99,943.99 ; U2.E10@1747.15,943.99 v1(1766.84,924.3) ; v1@1762.98,924.3 ccw(c1753.66,924.3) 1760.25,930.89 ccw(c1766.84,937.47) v1@1766.84,928.16
  SIG1 w4: v1(1766.84,924.3) cw(c1804.1,887.04) 1804.1,939.74 2523.82,939.74 cw(c2523.82,845.72) 2590.3,912.2 J2.66@2606.25,896.25
E11: J2.65 U2.E11 | length 1017.6
  Top Layer w10: U2.E11@1707.78,939.15 cw(c1707.78,927.45) 1716.05,935.72 cw(c1724.31,943.99) U2.E11@1712.62,943.99 ; U2.E11@1707.78,943.99 v1(1727.47,924.3) ; v1@1723.61,924.3 ccw(c1714.29,924.3) 1720.88,930.89 ccw(c1727.47,937.47) v1@1727.47,928.16
  SIG1 w4: v1(1727.47,924.3) cw(c1785.25,866.52) 1785.25,948.24 2549,948.24 2564.41,948.24 cw(c2564.41,916.96) 2586.52,939.08 ccw(c2612.06,964.61) 2612.06,928.5 2621.4,928.5 cw(c2621.4,885.96) 2651.48,916.04 J2.65@2664.02,903.5
E12: J2.62 U2.E12 | length 1002.1
  Top Layer w10: U2.E12@1668.41,939.15 cw(c1668.41,927.45) 1676.68,935.72 cw(c1684.94,943.99) U2.E12@1673.25,943.99 ; U2.E12@1668.41,943.99 v1(1688.1,924.3) ; v1@1684.24,924.3 ccw(c1674.92,924.3) 1681.51,930.89 ccw(c1688.1,937.47) v1@1688.1,928.16
  SIG2 w4: v1(1688.1,924.3) cw(c1725.36,887.04) 1725.36,939.74 2437.53,939.74 ccw(c2437.53,1178.77) J2.62@2606.55,1009.75
F9: J2.64 U2.F9 | length 876.6
  Top Layer w10: U2.F9@1786.52,978.52 cw(c1786.52,966.82) 1794.79,975.09 cw(c1803.05,983.36) U2.F9@1791.36,983.36 ; U2.F9@1786.52,983.36 v1(1806.21,963.67) ; v1@1802.35,963.67 ccw(c1793.03,963.67) 1799.62,970.26 ccw(c1806.21,976.84) v1@1806.21,967.53
  SIG1 w4: v1(1806.21,963.67) cw(c1843.47,926.41) 1843.47,979.11 2549.08,979.11 cw(c2549.08,916.79) 2593.14,960.86 J2.64@2607.15,946.85
F10: J2.63 U2.F10 | length 975.4
  Top Layer w10: U2.F10@1747.15,978.52 cw(c1747.15,966.82) 1755.42,975.09 cw(c1763.68,983.36) U2.F10@1751.99,983.36 ; U2.F10@1747.15,983.36 v1(1766.84,963.67) ; v1@1762.98,963.67 ccw(c1753.66,963.67) 1760.25,970.26 ccw(c1766.84,976.84) v1@1766.84,967.53
  SIG1 w4: v1(1766.84,963.67) cw(c1824.62,905.89) 1824.62,987.61 2577.9,987.61 2584.57,987.61 cw(c2584.57,975) 2593.49,983.91 ccw(c2606.56,996.98) 2606.56,978.5 2621.4,978.5 cw(c2621.4,935.96) 2651.48,966.04 J2.63@2664.02,953.5
F12: J2.57 U2.F12 | length 1079
  Top Layer w10: U2.F12@1668.41,978.52 cw(c1668.41,966.82) 1676.68,975.09 cw(c1684.94,983.36) U2.F12@1673.25,983.36 ; U2.F12@1668.41,983.36 v1(1688.1,963.67) ; v1@1684.24,963.67 ccw(c1674.92,963.67) 1681.51,970.26 ccw(c1688.1,976.84) v1@1688.1,967.53
  SIG2 w4: v1(1688.1,963.67) cw(c1725.36,926.41) 1725.36,979.11 2403.99,979.11 ccw(c2403.99,1203.19) 2562.44,1044.74 2583.26,1065.56 cw(c2614.5,1034.33) 2614.5,1078.5 2621.4,1078.5 ccw(c2621.4,1121.04) 2651.48,1090.96 J2.57@2664.02,1103.5
F13: J2.58 U2.F13 | length 1249.5
  Top Layer w10: U2.F13@1629.04,978.52 cw(c1629.04,966.82) 1637.31,975.09 cw(c1645.57,983.36) U2.F13@1633.88,983.36 ; U2.F13@1629.04,983.36 v1(1648.73,963.67) ; v1@1644.87,963.67 ccw(c1635.55,963.67) 1642.14,970.26 ccw(c1648.73,976.84) v1@1648.73,967.53
  SIG2 w4: v1(1648.73,963.67) cw(c1706.51,905.89) 1706.51,987.61 2372.8,987.61 ccw(c2372.8,1247.86) 2556.83,1063.83 J2.58@2606.7,1113.7 ; 2564.41,1071.41 cw(c2611.07,1024.75) J2.58@2611.07,1090.74 ; 2571.24,1078.24 cw(c2611.07,1038.41) J2.58@2611.07,1094.74 ; 2578.07,1085.07 cw(c2611.07,1052.07) J2.58@2611.07,1098.74 ; 2584.9,1091.9 cw(c2611.07,1065.72) J2.58@2611.07,1102.74 ; 2591.72,1098.72 cw(c2611.07,1079.38) J2.58@2611.07,1106.74
F14: J2.60 U2.F14 | length 1097.8
  Top Layer w10: U2.F14@1589.67,978.52 cw(c1589.67,966.82) 1597.94,975.09 cw(c1606.2,983.36) U2.F14@1594.51,983.36 ; U2.F14@1589.67,983.36 v1(1609.36,963.67) ; v1@1605.5,963.67 ccw(c1596.18,963.67) 1602.77,970.26 ccw(c1609.36,976.84) v1@1609.36,967.53
  SIG2 w4: v1(1609.36,963.67) ccw(c1646.62,1000.94) 1646.62,948.24 2359.89,948.24 ccw(c2359.89,1307.63) J2.60@2614.02,1053.5